# EAGLE board Master_Tally-NRF24 (EAGLE 7.1.0)
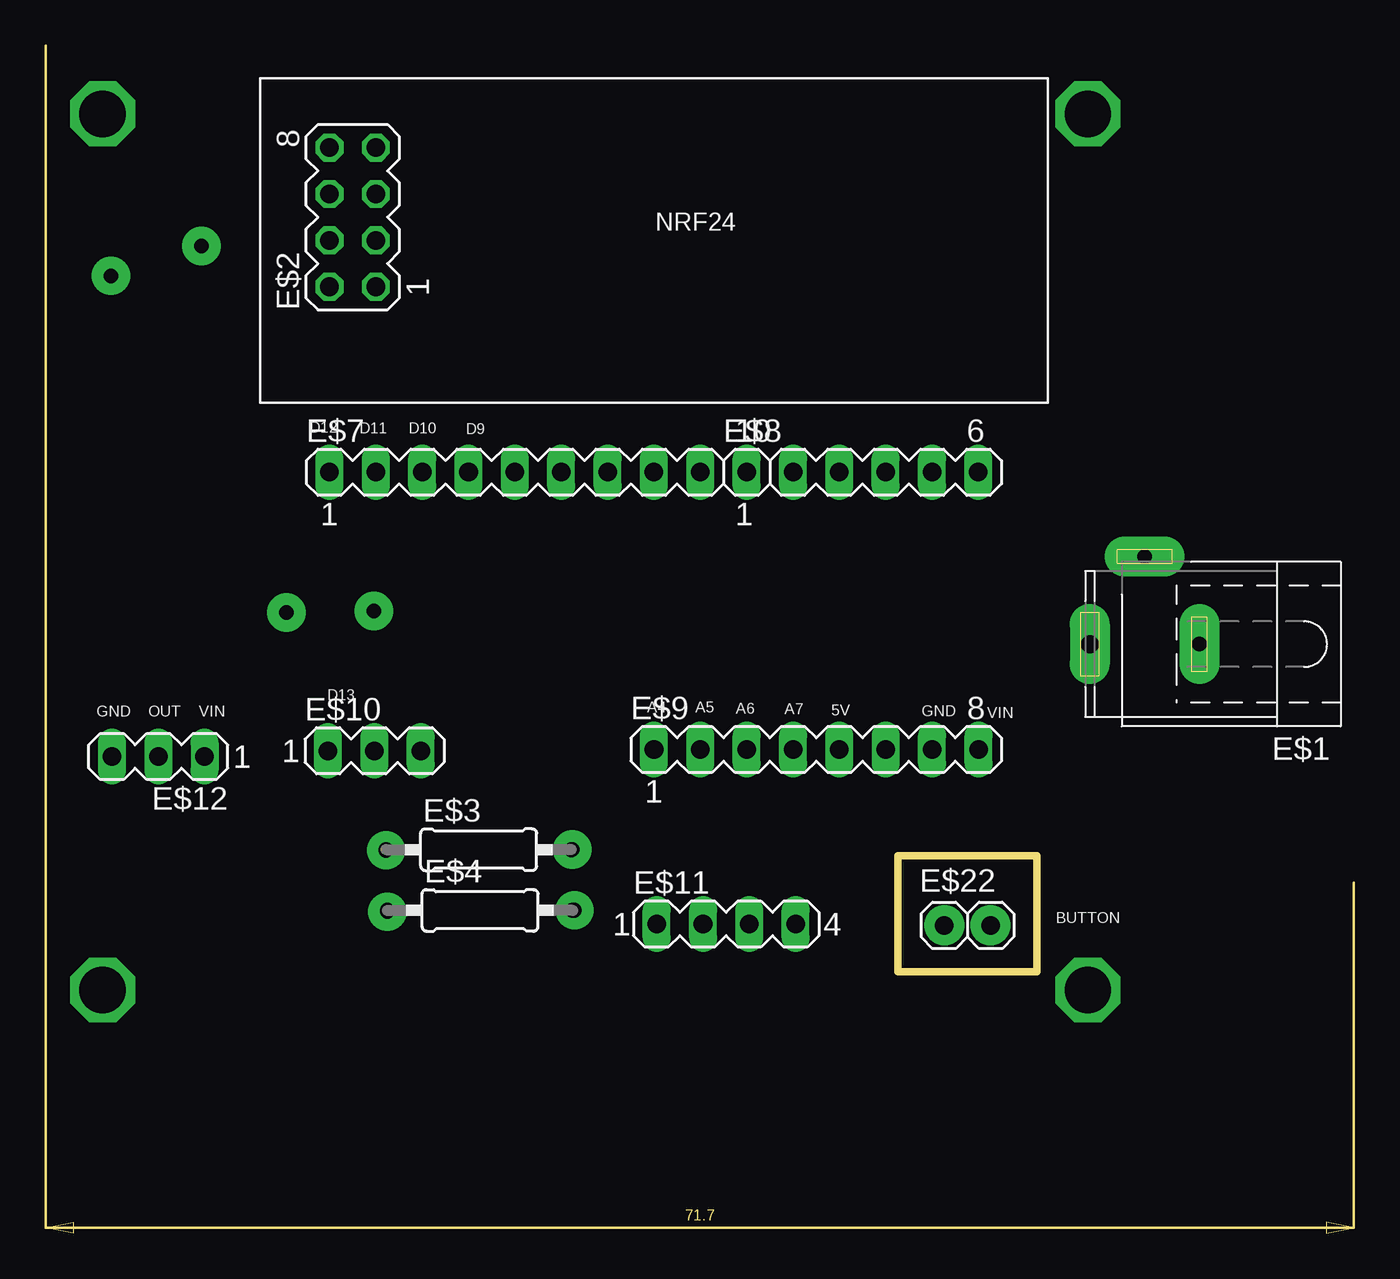
[diagram p0: board, top side]
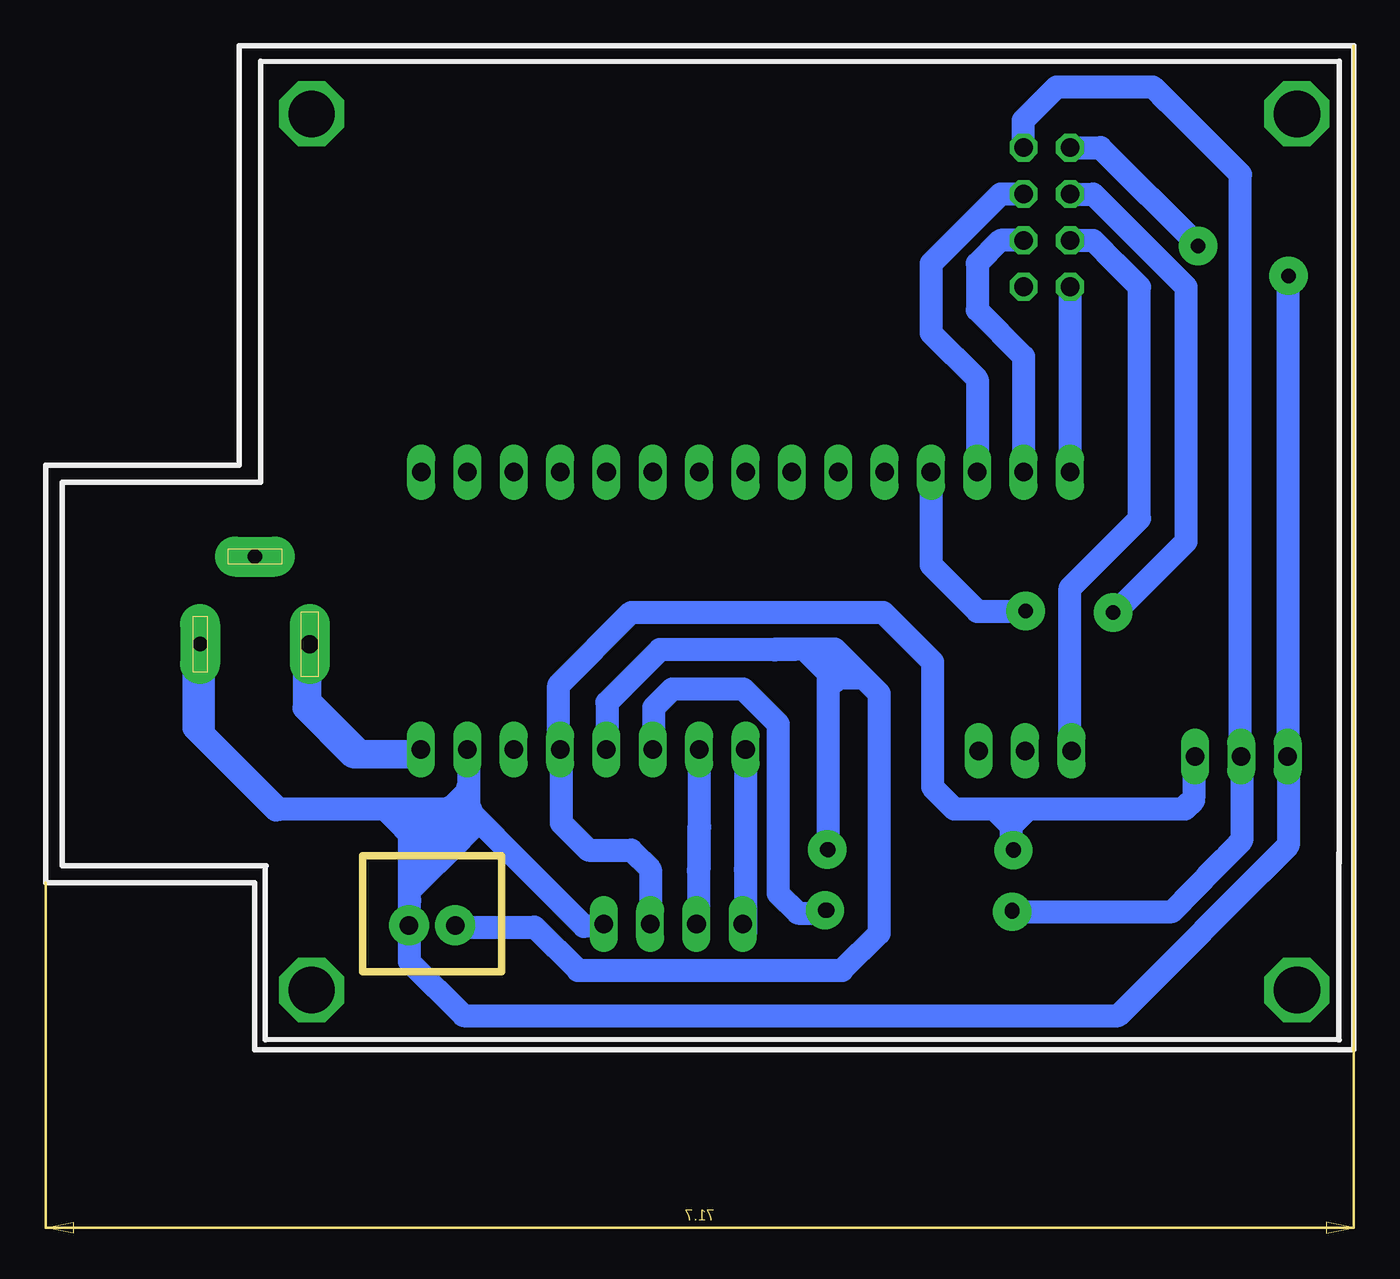
[diagram p1: board, bottom side, seen from below]

Size 71.7 x 65.07 mm. Coordinates in mm from the lower left corner, seen from the top.
Outline: 46.71,14.34 54.33,14.34 54.33,20.68 46.71,20.68 46.71,14.34
Copper layers (1*16): Top 0.035mm / dielectric 1.5mm / Bottom 0.035mm
Design rules "default": minimum track width 10mil, minimum drill 24mil, track to track 8mil, track to pad 8mil, pad to pad 8mil, via to via 8mil, smd to smd 8mil, copper to edge 40mil, drill to drill 8mil, minimum pad ring 10mil, minimum via ring 8mil, stop-mask expansion 4mil, vias tented up to drill 0mil, thermal gap 10mil
Holes 0.6 mm at 310.03,47.77 308.03,49.27 311.53,56.77 308.03,58.77 306.53,52.27 306.53,61.27 336.53,57.27 330.03,40.27 260.03,41.82 258.03,43.32 261.53,50.82 258.03,52.82 256.53,46.32 256.53,55.32 286.53,51.32 280.03,34.32

## Footprints (pad centres in the part's own frame; a part is rotated, then mirrored left to right if it is on the bottom)
SPC4078 = drill 0.8 pad 2.184 long: 1 -3,0; 2 0,-4.8 | drill 1 pad 2.184 long: 3 3,0
MA04-2 = drill 1.016 octagon: 1 -3.81,-1.27; 2 -3.81,1.27; 3 -1.27,-1.27; 4 -1.27,1.27; 5 1.27,-1.27; 6 1.27,1.27; 7 3.81,-1.27; 8 3.81,1.27
0207/10 = drill 0.813 octagon: 1 -5.08,0; 2 5.08,0
MA10-1 = drill 1.016 long: 1 -11.43,0; 2 -8.89,0; 3 -6.35,0; 4 -3.81,0; 5 -1.27,0; 6 1.27,0; 7 3.81,0; 8 6.35,0; 9 8.89,0; 10 11.43,0
MA06-1 = drill 1.016 long: 1 -6.35,0; 2 -3.81,0; 3 -1.27,0; 4 1.27,0; 5 3.81,0; 6 6.35,0
MA08-1 = drill 1.016 long: 1 -8.89,0; 2 -6.35,0; 3 -3.81,0; 4 -1.27,0; 5 1.27,0; 6 3.81,0; 7 6.35,0; 8 8.89,0
MA03-1 = drill 1.016 long: 1 -2.54,0; 2 0,0; 3 2.54,0
MA04-1 = drill 1.016 long: 1 -3.81,0; 2 -1.27,0; 3 1.27,0; 4 3.81,0
1X02 = drill 1.016 pad 2.184: 1 -1.27,0; 2 1.27,0

## Placement (x,y rotation side)
E$1  [SPC4078]  60.23,32.28 180 top
E$2  [MA04-2]  16.83,55.67 90 top
E$3  [0207/10]  23.73,21.02 0 top
E$4  [0207/10]  23.81,17.7 0 top
E$7  [MA10-1]  26.99,41.7 0 top
E$8  [MA06-1]  44.77,41.7 0 top
E$9  [MA08-1]  42.23,26.51 0 top
E$10  [MA03-1]  18.02,26.44 0 top
E$11  [MA04-1]  37.3,16.95 0 top
E$12  [MA03-1]  6.18,26.12 180 top
E$22  [1X02]  50.52,16.88 0 top

## Library data of the parts
E$1 = con-jack
E$2 E$7-E$12 = con-lstb
E$3 E$4 = eagle-ltspice
E$22 = pinhead

## Nets
S$1: E$2.2
S$2: E$2.3
S$3: E$2.5
S$5: E$2.4
S$6: E$2.6

## Tracks (layer width: path | path; a pad name or v marks a point on that pad's centre or on a via)
S$1
  Bottom 1.27: E$2.2 15.56,41.7
S$2
  Bottom 1.27: E$2.3 19.37,54.4 20.64,53.13 20.64,50.59 18.1,48.05 18.1,41.7
S$3
  Bottom 1.27: E$2.5 19.37,56.94 23.18,53.13 23.18,49.32 20.64,46.78 20.64,41.7
S$5
  Bottom 1.27: 15.56,26.46 15.56,35.35 11.75,39.16 11.75,51.86 13.02,53.13 14.29,54.4 E$2.4
S$6
  Bottom 1.27: E$2.6 14.29,56.94 9.21,51.86 9.21,37.89 13.02,34.08
S$7
  Bottom 1.27: 23.18,41.7 23.18,36.62 20.64,34.08 18.1,34.08
S$13
  Bottom 1.27: 33.35,19.94 33.32,19.91
S$14
  Bottom 1.27: 35.9,26.95 35.9,19.91 35.94,19.88
S$16
  Bottom 1.27: 41.06,16.82 42.2,16.82 48.44,23.06
S$21
  Bottom 1.27: 48.59,25.99 48.59,26.88
S$22
  Bottom 1.27: 35.9,16.22 35.9,22.22 35.86,22.26
S$26
  Bottom 1.27: 33.34,26.7 33.34,16.38
S$27
  Bottom 1.27: 38.61,16.37 38.53,16.29
S$29
  Bottom 1.27: 43.45,26.4 43.45,22.49 41.95,21 39.61,21 38.56,19.94 38.56,16.58 38.49,16.51
S$52
  Bottom 1.27: 41.17,16.92 41.17,17.46
S$56
  Bottom 1.27: 48.52,26.81 48.52,23.18 47.01,21.67
S$82
  Bottom 1.27: 38.36,26.45 38.36,28.81 37.34,29.83 33.47,29.83 31.55,27.92 31.55,18.62 30.48,17.54 28.85,17.54 28.84,17.56
S$89
  Bottom 1.27: 30.68,31.98 38.03,31.98 40.94,29.08 40.94,26.51 40.99,26.45
S$92
  Bottom 1.27: 51.16,26.38 54.44,26.38 57.21,29.14 57.21,32.49 57.27,32.55
S$93
  Bottom 1.27: 48.4,23.22 58.93,23.22 63.05,27.34 63.05,32.45 63.13,32.53
S$97  (via drill 0.8 pad 2.1)
  other vias: 28.87,21.03
S$100
  Bottom 1.27: 51.75,16.94 51.75,18.78 48.4,22.12
S$101
  Bottom 1.27: 48.56,24.45 48.56,22.04 49.58,21.02
S$103
  Bottom 1.27: 48.88,23.22 48.88,21.63 51.72,18.79
S$104
  Bottom 1.27: 57.54,32.41 57.54,28.77 54.89,26.12 51.7,26.12 51.22,26.61
S$109
  Bottom 1.27: 49.23,16.78 44.91,16.78 42.53,14.4 28.05,14.4 26.01,16.44 26.01,29.57 28.45,32.01 31.68,32.01 31.73,31.96
S$116
  Bottom 1.27: 49.57,23.32 49.48,23.32 48.72,24.07
S$117
  Bottom 1.27: 63.58,32.29 63.58,27.69 59.09,23.21
S$118
  Bottom 1.27: 28.8,20.93 28.8,31.83
S$119
  Bottom 1.27: 28.96,30.87 28.98,30.87 30.09,31.97
S$120
  Bottom 1.27: 28.53,30.21 28.49,30.21 27.73,30.98 27.77,30.98 27.93,30.81
S$121
  Bottom 1.27: 28.68,30.44 27,30.44 26.96,30.4
S$122  (via drill 0.8 pad 2.1)
  other vias: 17.99,34.09
S$123  (via drill 0.8 pad 2.1)
  other vias: 13.19,34.01 8.54,54.09 3.58,52.46
S$124  (via drill 0.8 pad 2.1)
  other vias: 18.74,17.62
S$125  (via drill 0.8 pad 2.1)
  other vias: 18.66,20.99
S$126  (via drill 0.8 pad 2.1)
  other vias: 28.98,17.7
S$127
  Bottom 1.27: 19.15,17.63 9.98,17.63 6.38,21.29
S$128
  Bottom 1.27: 6.15,26.33 6.15,21.51 8.05,19.61
S$129
  Bottom 1.27: 6.21,26.16 6.21,58.01 10.91,62.71
S$130
  Bottom 1.27: 18.13,59.34 18.13,60.97 16.29,62.81 11.03,62.81 10.21,61.99
S$153
  Bottom 1.27: 3.6,26.17 3.6,52.42 3.58,52.44
S$173
  Bottom 1.27: 15.64,59.48 13.89,59.48 8.53,54.13
S$180
  Bottom 1.27: 51.77,16.65 51.77,14.89 48.81,11.92 12.91,11.92 3.64,21.21
S$184
  Bottom 1.27: 3.61,26.23 3.61,21.23 5.1,19.74
S$185
  Bottom 1.27: 51.75,18.24 51.75,22.87 51.54,23.07 51.54,21.3 50.83,20.59 50.83,22.25 50.73,22.36 50.66,22.36 50.08,21.78 50.08,21.95 49.91,22.12 49.91,22.25 49.74,22.42
S$186
  Bottom 1.27: 51.17,21.13 51.17,21.27 53.11,23.21
S$187
  Bottom 1.27: 43.59,26.48 43.59,30.04 39.61,34.02 25.81,34.02 23.09,31.31 23.09,24.44 21.91,23.26 9.24,23.26 8.78,23.71
S$188
  Bottom 1.27: 8.78,26.65 8.78,23.84 9.23,23.39
S$189
  Bottom 1.27: 18.78,20.88 18.78,23.21 18.77,23.22
S$190
  Bottom 0.9: 19,22.31 19.04,22.31 19.84,23.11
S$191
  Bottom 0.9: 18.62,22.25 18.59,22.25 17.83,23.01
S$192  (via drill 2.54 pad 3)
  other vias: 3.12,61.33
S$193  (via drill 2.54 pad 3)
  other vias: 57.12,61.33
S$194  (via drill 2.54 pad 3)
  other vias: 57.12,13.33
S$195  (via drill 2.54 pad 3)
  other vias: 3.12,13.33

## Text on the board
tNames: NRF24 | D12 | D11 | D10 | D9 | D13 | GND | OUT | VIN | A4 | A5 | A6 | A7 | 5V | GND | VIN | BUTTON